# Altium PCB PCBmachcongsuat.PcbDoc
Units mil, origin at the board's own origin, x right, y up, seen from the top; angles counter-clockwise.
Board outline 6000 x 4000 mil, 2 copper layers (Top Layer, Bottom Layer); 47 components, 19 nets, 112 pads, 11 vias.
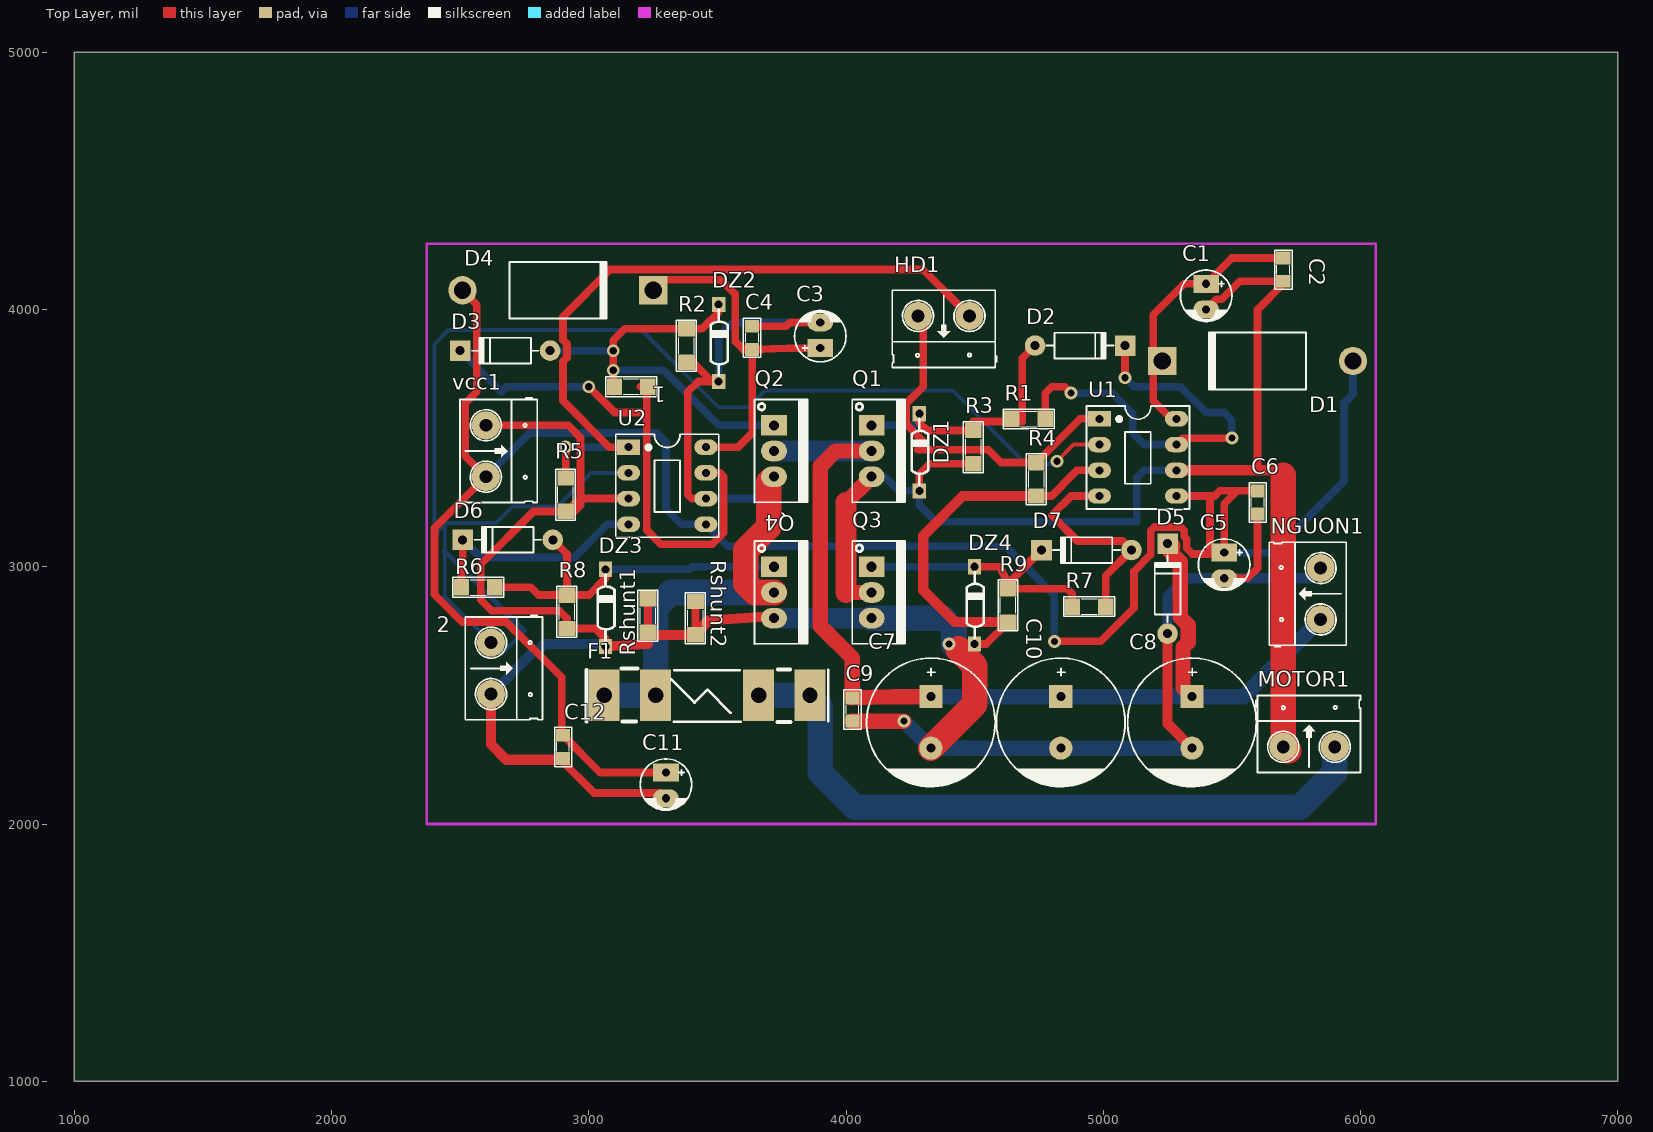
[diagram p0: Top Layer view]
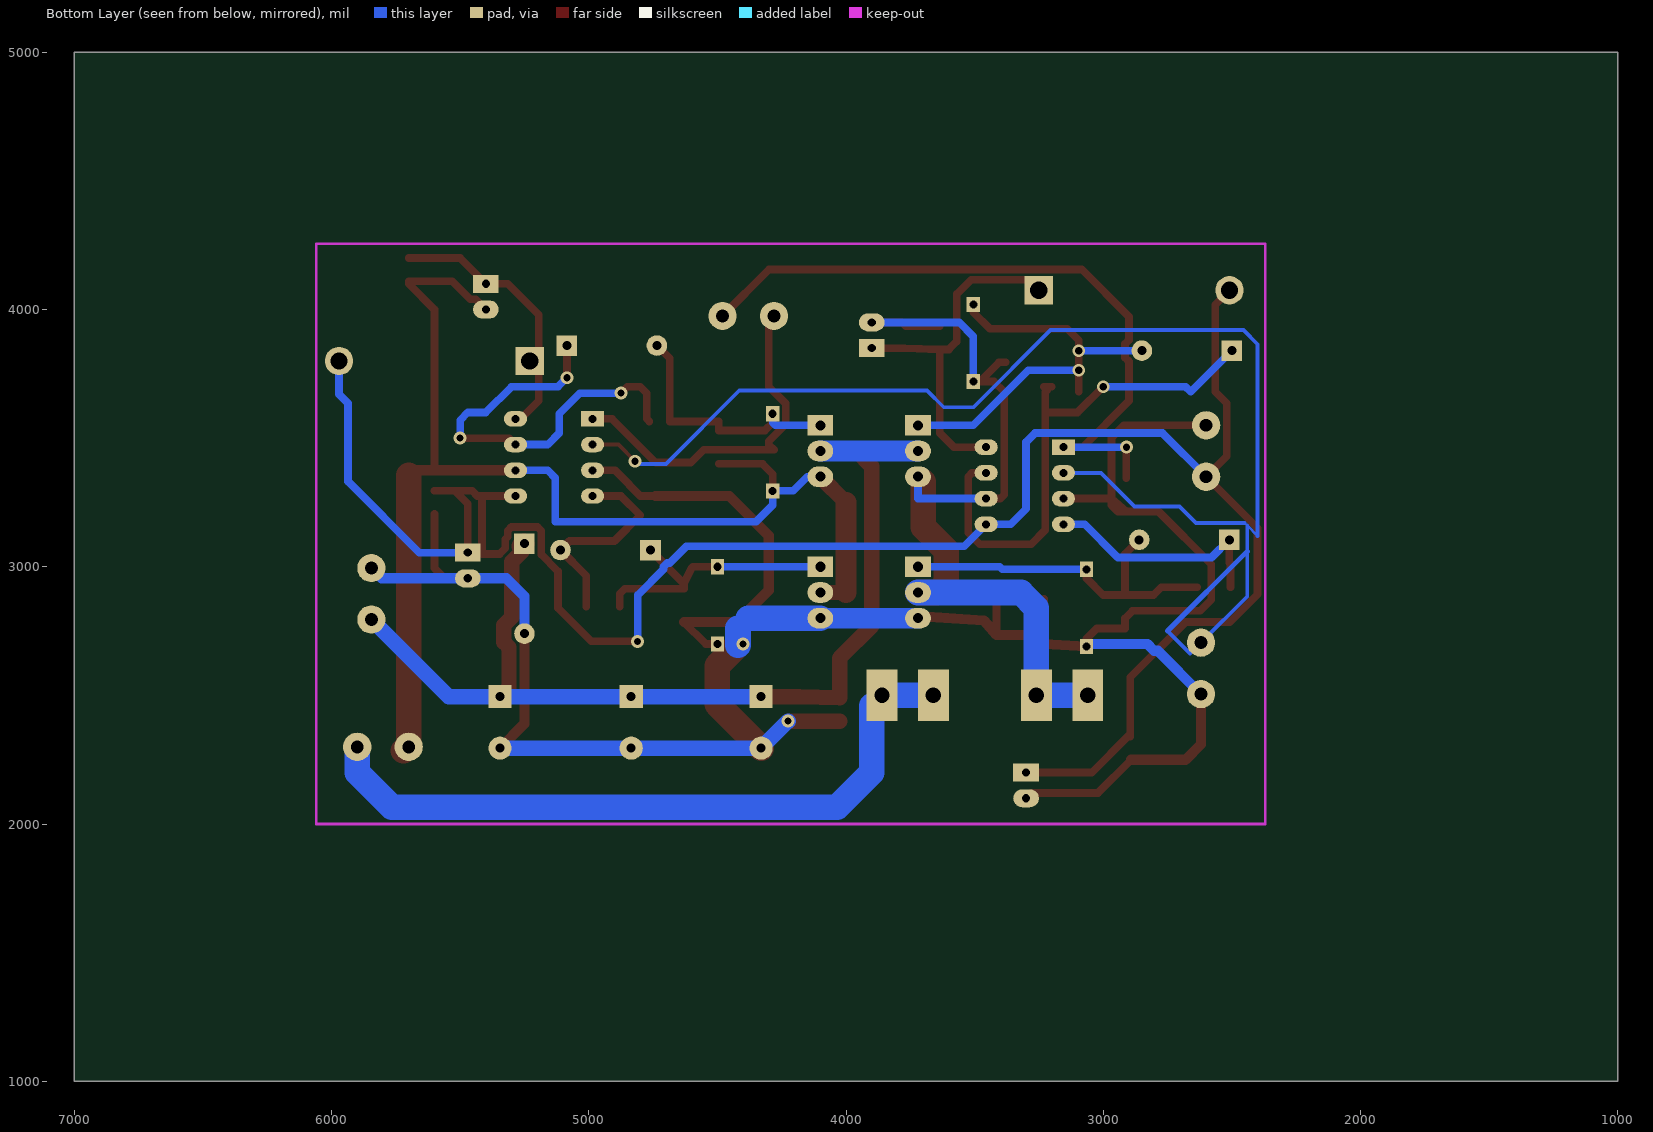
[diagram p1: Bottom Layer view, seen from below]
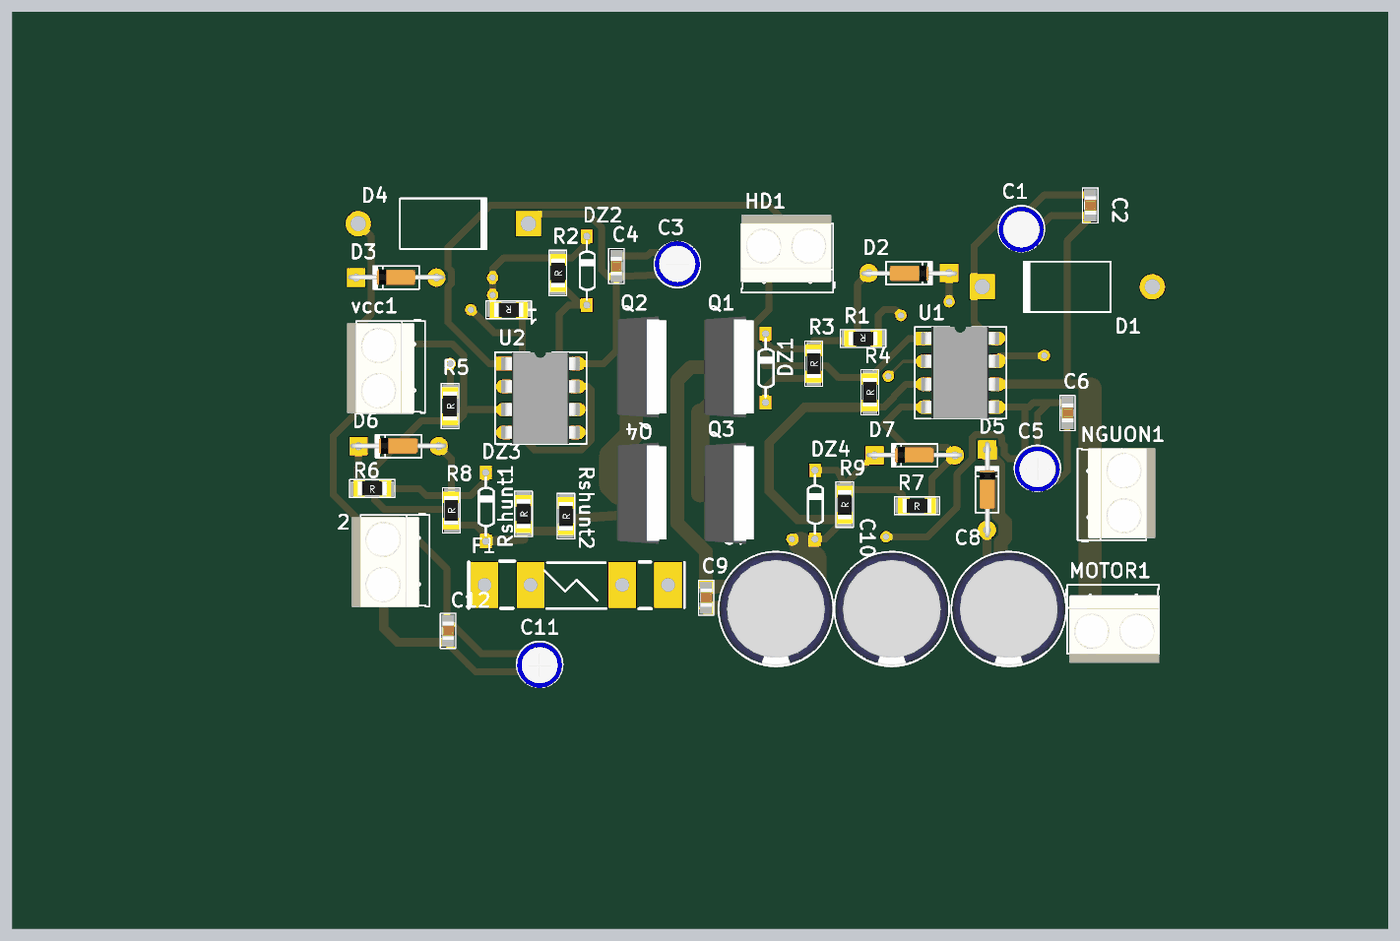
[diagram p2: 3D render of the assembled board from above, using the file's embedded part models]

## Layer stack, top to bottom
Top Solder: solder mask 0.4, Solder Resist, Dk 3.5
Top Layer: signal copper 1.4
Dielectric 1: dielectric 12.6, FR-4, Dk 4.8
Bottom Layer: signal copper 1.4
Bottom Solder: solder mask 0.4, Solder Resist, Dk 3.5

## Board outline
1000,1000 7000,1000 7000,5000 1000,5000

## Design rules (kind name [scope] priority, off if disabled: settings)
Clearance [All] p1: gap=10 ignorepadtopadclearanceinfootprint=FALSE
PolygonConnect [All] p1: connectstyle=Relief reliefconductorwidth=10 reliefentries=4 polygonreliefangle="90 Angle" airgapwidth=10
RoutingVias [All] p1: holewidth=50 width=50 viastyle="Through Hole" minholewidth=24 minwidth=50 maxholewidth=28 maxwidth=50
SolderMaskExpansion [All] p1: expansion=4
Width [All] p1: maxlimit=200 minlimit=10 preferedwidth=30
30 further rules are at their usual default settings.

## Components (designator, comment, footprint, x,y, rotation, side; value= is the part's Value field where it differs from the comment)
1 "10R" SM-1206 3165,3700 r180 top value="R1/4W - 1K"
2 "Header 2" HED2 2620,2705 r270 top
C1 "10uF" CP1/2 5400,4100 r270 top value=10uF/50V
C2 "104" SM-0805 5700,4155 r90 top value=103
C3 "10uF" CP1/2 3900,3850 r90 top value=10uF/50V
C4 "104" SM-0805 3635,3890 r270 top value=103
C5 "10uF" CP1/2 5470,3055 r270 top value=10uF/50V
C6 "104" SM-0805 5600,3250 r90 top value=103
C7 "Cap Pol3" CP2/5 4330,2495 r270 top value=220uF/35V
C8 "Cap Pol3" CP2/5 5345,2495 r270 top value=220uF/35V
C9 "104" SM-0805 4025,2445 r90 top value=103
C10 "Cap Pol3" CP2/5 4835,2495 r270 top value=220uF/35V
C11 "10uF" CP1/2 3300,2200 r270 top value=10uF/50V
C12 "104" SM-0805 2900,2300 r90 top value=103
D1 "Diode 1N5408" DO-201AD 5600,3800 r180 top
D2 "1N4148" D1A 4735,3860 r180 top value=1N4007
D3 "1N4148" D1A 2850,3840 r0 top value=1N4007
D4 "Diode 1N5408" DO-201AD 2880,4075 r0 top
D5 "1N4007" D1A 5250,2740 r270 top
D6 "1N4148" D1A 2860,3105 r0 top value=1N4007
D7 "1N4148" D1A 5110,3065 r0 top value=1N4007
DZ1 "Diode Zener" DIODE/NOM/0.5A 4285,3295 r90 top
DZ2 "Diode Zener" DIODE/NOM/0.5A 3505,3720 r90 top
DZ3 "Diode Zener" DIODE/NOM/0.5A 3065,2690 r90 top
DZ4 "Diode Zener" DIODE/NOM/0.5A 4500,2700 r90 top
F1 "F1A" Fuse 3460,2500 r0 top value=Fuse
HD1 "Header 2" HED2 4480,3975 r180 top
MOTOR1 "Header 2" HED2 5700,2300 r0 top
NGUON1 "Header 2" HED2 5845,2795 r90 top
Q1 "IRF540N" QTO-220 4100,3550 r270 top value=IRF840
Q2 "IRF540N" QTO-220 3720,3550 r270 top value=IRF840
Q3 "IRF540N" QTO-220 4100,3000 r270 top value=IRF840
Q4 "IRF540N" QTO-220 3720,3000 r270 top value=IRF840
R1 "10R" SM-1206 4710,3575 r180 top value="R1/4W - 1K"
R2 "4k7" SM-1206 3380,3860 r90 top value="R1/4W - 1K"
R3 "4k7" SM-1206 4495,3465 r90 top value="R1/4W - 1K"
R4 "10k" SM-1206 4740,3340 r90 top value="R1/4W - 1K"
R5 "10k" SM-1206 2910,3280 r90 top value="R1/4W - 1K"
R6 "10R" SM-1206 2570,2920 r0 top value="R1/4W - 1K"
R7 "10R" SM-1206 4945,2845 r0 top value="R1/4W - 1K"
R8 "4k7" SM-1206 2915,2825 r90 top value="R1/4W - 1K"
R9 "4k7" SM-1206 4630,2850 r90 top value="R1/4W - 1K"
Rshunt1 "0.1" SM-1206 3230,2810 r90 top value="R1/4W - 1K"
Rshunt2 "0.1" SM-1206 3415,2800 r90 top value="R1/4W - 1K"
U1 "IR2184" DIP8/W0.3 4985,3575 r270 top
U2 "IR2184" DIP8/W0.3 3155,3465 r270 top
vcc1 "Header 2" HED2 2600,3550 r270 top

## Footprints (in the part's own frame and the unit in brackets; to place one, negate y for a bottom-side part, rotate by r counter-clockwise, add the part's x,y. Pads: shape width x height; smd on the part's side, far side on the other; paste and mask are expansions set on the pad)
CP1/2 [mil] "Tu hoa < 22uF/16>50V"
  rect 70x100 hole 32: 1(0,0)
  oval 70x100 hole 32: 2(100,0)
  silkscreen extent -53,-100 146,100, body extent -49,-99 149,99, height 287
CP2/5 [mil] "Tu hoa 1000uF/25V,50V"
  rect 90x90 hole 35: 1(0,0)
  round 90 hole 35: 2(200,0)
  silkscreen extent -150,-250 350,250, body extent -147,-246 345,246, height 650
D1A [mil] "Diode 1A, W 100mil, L 350mil"
  round 80 hole 35: 1(0,0)
  rect 80x80 hole 35: 2(-350,0)
  silkscreen extent -305,-50 -45,50, body extent -386,-33 34,36, height 84
DIODE/NOM/0.5A [mm]
  rect 1.5x1.3 hole 0.8: 1(0,0) 2(7.62,0)
  silkscreen extent 0.64,-0.89 7.11,0.76
DIP8/W0.3 [mil] "8 PIN, W 300mil, Pin to pin 100mil"
  rect 60x90 hole 31: 1(0,0)
  oval 60x90 hole 31: 2(100,0) 3(200,0) 4(300,0) 5(300,300) 6(200,300) 7(100,300) 8(0,300)
  silkscreen extent -50,-50 350,350, body extent -50,-40 350,336, height 201
DO-201AD [mm] "Diode, Axial; Body 9.5 x 5.6 mm (LxDia. max), Lead Dia. 1.32 mm (max)"
  round 2.8 hole 1.7: 1(-9.42,0)
  rect 2.8x2.8 hole 1.7: 2(9.42,0)
  silkscreen extent -4.8,-2.8 4.9,2.8
Fuse [mil] "3A"
  rect 120x200 hole 60: 1(-400,0) 1(-200,0) 2(200,0) 2(400,0)
  silkscreen extent -469,-104 471,104, body extent -335,-100 335,105, height 100
HED2 [mil] "Header 2, 2 pin, hight 300mil, Pin to Pin 200, Colour Green"
  round 110 hole 50: 1(0,0) 2(200,0)
  silkscreen extent -106,-100 300,200, body extent -92,-140 302,155, height 394
QTO-220 [mil] "TO-220 - 1-2-3"
  rect 80x100 hole 39: 1(0,0)
  oval 80x100 hole 39: 2(100,0) 3(200,0)
  silkscreen extent -100,-76 300,130, body extent -121,-85 321,100, height 755
SM-0805 [mil] "Compoment SMD 80x50mil"
  rect 50x55 smd: 1(-45,0) 2(45,0)
  silkscreen extent -77,-34 76,33, body extent -40,-27 40,23, height 24
SM-1206 [mil] "Compoment SMD 120x60mil"
  rect 60x65 smd: 1(-65,0) 2(65,0)
  silkscreen extent -99,-38 99,39, body extent -83,-35 83,36, height 25

## Part data
1 R1 R2 R3 R4 R5 R6 R7 R8 R9 Rshunt1 Rshunt2: library part R, "Resistor 1/4W"
2 HD1 MOTOR1 NGUON1 vcc1: library part Hed2, "Header 2 (Green)"
C1 C3 C5 C11: library part CP1, "Cap P  0,1uF < 22uF , 16 - 50V", Description 1="10 => 220uF/6,3V/10V - 10uF => 100uF/16V", Description 2="0,1uF => 33uF/50V - 10uF => 22uF/63V", Description 3="0,47uF => 10uF/100V"
C2 C4 C6 C9 C12: library part CM, "Cap SMD"
C7 C8 C10: "Polarized Capacitor (Surface Mount)", LatestRevisionDate=17-Jul-2002, LatestRevisionNote="Re-released for DXP Platform.", PackageReference=C0805, Publisher="Altium Limited"
D1 D4: "3 Amp Medium Power Silicon Rectifier Diode", ComponentLink1Description="Manufacturer Link", ComponentLink1URL=http://www.irf.com/, DatasheetVersion=Aug-1984, LatestRevisionDate=17-Jul-2002, LatestRevisionNote="Re-released for DXP Platform.", PackageDescription="Diode, Axial; Body 9.5 x 5.3 mm (LxDia. max), Lead Dia. 1.32 mm (max)", PackageReference=DO-201AD, Published=8-Jun-2000, Publisher="Altium Limited"
D2 D3 D5 D6 D7: library part D1A, "Diode 1A"
DZ1 DZ2 DZ3 DZ4: "Zener Diode", LatestRevisionDate=17-Jul-2002, LatestRevisionNote="Re-released for DXP Platform.", PackageReference=DIODE-0.7, Published=8-Jun-2000, Publisher="Altium Limited"
F1: library part Fuse, "Fuse", Designed by=VanDungEvn
Q1 Q2 Q3 Q4: library part IRF840, "MOSFET N - CHANNEL 500V - 0.75 - 8A - TO-220"
U1 U2: "Half-Bridge Driver"

## Via types
v1: diameter 50, hole 28, Top Layer to Bottom Layer, 11 vias

## Nets (pads, with @x,y where several pads share a name; then routed paths per layer and width w, separated by ;. In a path a pad name is that pad's centre, name@x,y a point inside that pad or via, vN(x,y) a via of type N, cw(c..) or ccw(c..) an arc to the next point about the centre after c; other vN are vias at no path point)
5V: 2.1 U1.2 U2.2 | length 5656.9
  Top Layer w15: v1(4820,3410) 4885,3475 U1.2
  Bottom Layer w10: 2400,3120 2440,3160 2450,3170 ; 2.1 2662.5,2662.5
  Bottom Layer w15: 2400,3120 2400,3865 2455,3920 3205,3920 3505,3620 3620,3620 3685,3685 4415,3685 4700,3400 v1@4820,3400 ; 2440,3059.64 2440,2885 2.1 ; 2440,3060 2440,3160 ; 2450,3170 2640,3170 2704,3234 2878,3234 3009,3365 U2.2 ; 2662.5,2662.5 2750,2750
  Bottom Layer w20: 2440,3060 2750,2750
24V: C7.1 C8.1 C9.2 C10.1 D5.2 NGUON1.1 Q1.2 Q2.2 | length 4151.9
  Top Layer w60: Q1.2 3960,3450 3900,3390 3900,2770 4025,2645 C9.2 4182,2495 C7.1 ; D5.2@5260,3080 5260,3058.79 5300,3018.79 5300,2803.14 5330,2773.14 5330,2706.86 5310,2686.86 5310,2530 C8.1
  Top Layer w80: D5.2 D5.2@5260,3080
  Bottom Layer w60: C7.1 C10.1 C8.1 5545,2495 NGUON1.1
  Bottom Layer w80: Q2.2 Q1.2
+12V: C5.1 C6.2 C11.1 C12.2 D1.1 D4.1 U1.5 U2.5 vcc1.2 | length 8442
  Top Layer w30: D4.1 2565,4019.13 2565,3680 2520,3635 2520,3430 vcc1.2 2400,3150 2400,2893 2508,2785 2680,2785 2895,2570 2895,2340 C12.2@2899.73,2339.76 ; C12.2 3045,2200 C11.1 ; v1(4810,2710) 4990,2710 5120,2840 5120,2983.08 5185,3048.08 5185,3140.36 5199.64,3155 5300.36,3155 5315,3140.36 5315,3116.92 5325,3106.92 5325,3071.57 5346.57,3050 5415,3050 5415,3270 5410,3275 ; U1.5@5265,3275 U1.5 5410,3275 ; C5.1 5470,3245 5520,3295 ; C6.2 5520,3295 ; 5410,3275 5433,3275 5453,3295 5520,3295
  Bottom Layer w30: vcc1.2 2770,3520 3265,3520 3300,3485 3300,3225 3360,3165 U2.5 3540,3080 4620,3080 4685.36,3014.64 4695,3014.64 4709.64,3000 4709.64,2990.36 4810,2890 v1(4810,2710) ; C5.1 5659,3055 5935.87,3331.87 5935.87,3635.87 5970.87,3670.87 D1.1
GND: 2.2 C5.2 C6.1 C7.2 C8.2 C9.1 C10.2 C11.2 C12.1 D5.1 DZ3.1 DZ4.1 NGUON1.2 Q3.3 Q4.3 R4.1 R5.1 R8.1 R9.1 Rshunt1.1 Rshunt1.2 Rshunt2.1 Rshunt2.2 U1.3 U2.3 vcc1.1 | length 10470.3
  Top Layer w30: vcc1.1 2920,3550 2968,3502 2968,3265 ; C12.1@2891.34,2250 3020.67,2120.67 3279.33,2120.67 C11.2 ; DZ3.1 3065,2720 3025,2760 R8.1 2915,2800 2886,2829 2623,2829 2580,2872 2580,3010 2785,3215 R5.1 ; U2.3 2968,3265 ; Rshunt1.2 Rshunt1.1 Rshunt1.1@3238.23,2735 ; Rshunt2.1 Rshunt2.2 ; Q4.3@3711.65,2807.32 Q4.3 ; 4438.13,2680.73 DZ4.1@4501.4,2688.26 ; DZ4.1 4545,2700 R9.1 ; R4.1 4800,3275 4843,3318 4843,3320 4898,3375 U1.3@4965,3375 ; C5.2 5560,2955 5600,2995 C6.1 ; R5.1 2943,3215 2968,3240 2968,3265 ; R5.1 2968,3265
  Top Layer w40: 2.2 2620,2310 2680,2250 C12.1@2891.34,2250 ; DZ3.1 3230,2700 Rshunt1.1 ; Rshunt1.1@3238.23,2735 Rshunt2.1 3464.19,2791.09 Q4.3@3711.65,2807.32 ; R9.1 4424,2785 4300,2909 4300,3121 4454,3275 R4.1 ; D5.1 5250,2390 C8.2
  Top Layer w60: C9.1 v1(4225,2400)
  Top Layer w100: C7.2 4500,2465 4500,2615 4436.2,2678.8 4438.13,2680.73
  Bottom Layer w10: 2788.54,2673.54 2802.68,2673.54 ; DZ3.1@3055,2700 DZ3.1
  Bottom Layer w30: 4380,2800 4420,2760 ; 5805,2955 NGUON1.2
  Bottom Layer w40: 2.2 2788.54,2673.54 ; 2802.68,2673.54 2829.14,2700 DZ3.1@3055,2700 ; D5.1 5250,2885 5320,2955 C5.2 5805,2955
  Bottom Layer w60: v1(4225,2400) C7.2 C10.2 C8.2
  Bottom Layer w80: Q4.3 Q3.3
  Bottom Layer w100: Q3.3 4380,2800 ; v1@4420,2695 4420,2760
  other v1: 4400,2700
M+: C1.2 C2.1 DZ1.1 MOTOR1.1 Q1.3 Q3.2 R3.1 U1.6 | length 4968.7
  Top Layer w30: DZ1.1 4285,3360 4325,3400 R3.1 ; U1.6@5265,3375 U1.6 ; C1.2 5440,4040 5460.36,4040 5530.36,4110 C2.1 ; 5600,3375 5600,4000 C2.1@5700,4100
  Top Layer w40: U1.6 5600,3375 5680,3375 5700,3355
  Top Layer w60: 4000,2900 Q3.2 ; 4000,3250 Q1.3
  Top Layer w80: 4000,2900 4000,3250
  Top Layer w100: 5700,3355 5700,2305 MOTOR1.1@5720,2285
  Bottom Layer w30: Q1.3 4150,3350 4205,3295 DZ1.1 4285,3240 4350,3175 5130,3175 5130,3345 5160,3375 U1.6@5265,3375
M-: F1.2 MOTOR1.2 | length 2721.7
  Bottom Layer w40: MOTOR1.2@5900,2265 MOTOR1.2@5920,2285
  Bottom Layer w50: F1.2@3860,2500 F1.2@3900,2460
  Bottom Layer w100: F1.2@3660,2500 F1.2@3860,2500 ; F1.2@3900,2460 3900,2200 4035,2065 5765,2065 5900,2200 MOTOR1.2@5900,2265
Net1_1: 1.1 D3.2 U2.7 | length 2053.2
  Top Layer w30: v1(3000,3700) 3100,3600 3225,3600 ; 1.1@3200,3700 1.1 ; 1.1@3217.5,3687.5 3225,3680 3225,3600 ; U2.7 3510,3365 3525,3350 3525,3133 3480,3088 3280,3088 3225,3143 3225,3600
  Bottom Layer w30: D3.2 2660,3680 2680,3700 v1(3000,3700)
Net1_2: 1.2 D3.1 DZ2.2 Q2.1 R2.2 | length 1644.2
  Top Layer w30: 1.2@3095,3680 v1(3095,3764) v1(3095,3840) 3095,3880 3140,3925 R2.2 3440,3925 3505,3990 DZ2.2
  Bottom Layer w30: D3.1 v1(3095,3840) ; v1(3095,3764) 3292,3764 3506,3550 Q2.1
NetC1_1: C1.1 C2.2 D1.2 U1.8 | length 1030.8
  Top Layer w30: U1.8@5265,3575 5194.13,3645.87 5194.13,3979.13 5315,4100 C1.1 5500,4200 C2.2
NetC3_1: C3.1 C4.2 D4.2 U2.8 | length 1414
  Top Layer w30: D4.2 3291.87,4116 3513,4116 3569,4060 3569,3876 3600,3845 C4.2 ; U2.8 3580,3465 3635,3520 C4.2 ; C3.1 3773,3850 C4.2
NetC3_2: C3.2 C4.1 DZ2.1 F1.1 Q2.3 Q4.2 R2.1 U2.6 | length 3567.7
  Top Layer w30: R2.1 3405,3795 DZ2.1@3480,3720 ; U2.6 3400,3265 3385,3280 3385,3680 3425,3720 DZ2.1@3480,3720 ; DZ2.1 DZ2.1@3480,3720 ; C4.1 3768,3935 3783,3950 C3.2 ; Q2.3@3700,3330 Q2.3
  Top Layer w100: Q2.3@3700,3330 3700,3154.85 3610,3064.85 3610,2935.15 3645.15,2900 Q4.2
  Bottom Layer w30: U2.6 3720,3265 Q2.3 ; DZ2.1 3505,3895 3560,3950 C3.2
  Bottom Layer w100: F1.1@3060,2500 3260,2500 3260,2840 3320,2900 Q4.2
NetD2_1: D2.1 DZ1.2 Q1.1 R1.2 R3.2 | length 1022.3
  Top Layer w30: DZ1.2 4285,3560 4315,3530 R3.2 4495,3565 4685,3565 4685,3810 D2.1
  Bottom Layer w30: Q1.1 4275,3550 4285,3560 DZ1.2
NetD2_2: D2.2 R1.1 U1.7 | length 1635.2
  Top Layer w30: R1.1@4765,3565 R1.1 4775,3675 4800,3700 4850,3700 v1(4875,3675) ; v1@5085,3755 D2.2 ; U1.7 5310,3500 v1(5500,3500)
  Bottom Layer w30: v1(4875,3675) 5035,3675 5115,3595 5115,3520 5160,3475 U1.7@5265,3475 ; v1(5085,3735) 5120,3700 5300,3700 5400,3600 5469.73,3600 5500,3569.73 v1(5500,3500)
NetD6_1: D6.1 DZ3.2 Q4.1 R6.2 R8.2 | length 1401.3
  Top Layer w30: R6.2 2775,2920 2805,2890 R8.2 ; D6.1 2915,3050 R8.2 ; DZ3.2 3065,2955 3000,2890 R8.2
  Bottom Layer w30: DZ3.2 3393,2990 3403,3000 Q4.1
NetD6_2: D6.2 R6.1 U2.4 | length 914.1
  Top Layer w30: R6.1 2505,3012 2510,3017 D6.2
  Bottom Layer w30: D6.2 2579,3036 2943,3036 3072,3165 U2.4
NetD7_1: D7.1 R7.2 U1.4 | length 823.4
  Top Layer w30: U1.4@4965,3275 4875,3275 4800,3200 4900,3100 5075,3100 D7.1 5010,2965 R7.2
NetD7_2: D7.2 DZ4.2 Q3.1 R7.1 R9.2 | length 1081.3
  Top Layer w30: DZ4.2 4595,3000 4600,2995 R9.2@4630,2935 ; D7.2 R9.2@4630,2935 ; R7.1 4880,2895 4860,2915 R9.2 R9.2@4630,2935
  Bottom Layer w30: Q3.1 DZ4.2
pwm1: HD1.1 R5.2 U2.1 | length 2765.2
  Top Layer w30: R5.2 v1(2910,3465) ; U2.1 3080,3465 2900,3645 2900,3798.08 2915,3813.08 2915,3866.92 2900,3881.92 2900,3972 3084,4156 4299,4156 HD1.1
  Bottom Layer w30: v1(2910,3465) U2.1
pwm2: HD1.2 R4.2 U1.1 | length 1387
  Top Layer w30: HD1.2 4300,3955 4300,3700.47 4234.41,3634.88 4234.41,3554.02 4300,3488.43 4300,3475 4280,3455 4553,3455 4603,3405 R4.2 4910,3575 U1.1

## Keep-outs
Keep-Out Layer:
  lines w10: 6010,4255 6060,4255 6060,2000 2370,2000 2370,4255 5890,4255 6055,4255